# Altium PCB mcu2.PcbDoc
Units mil, origin at the board's own origin, x right, y up, seen from the top; angles counter-clockwise.
Board outline 5622.9 x 6902.9 mil, 2 copper layers (Top Layer, Bottom Layer); 9 components, 25 nets, 74 pads, 1 vias.
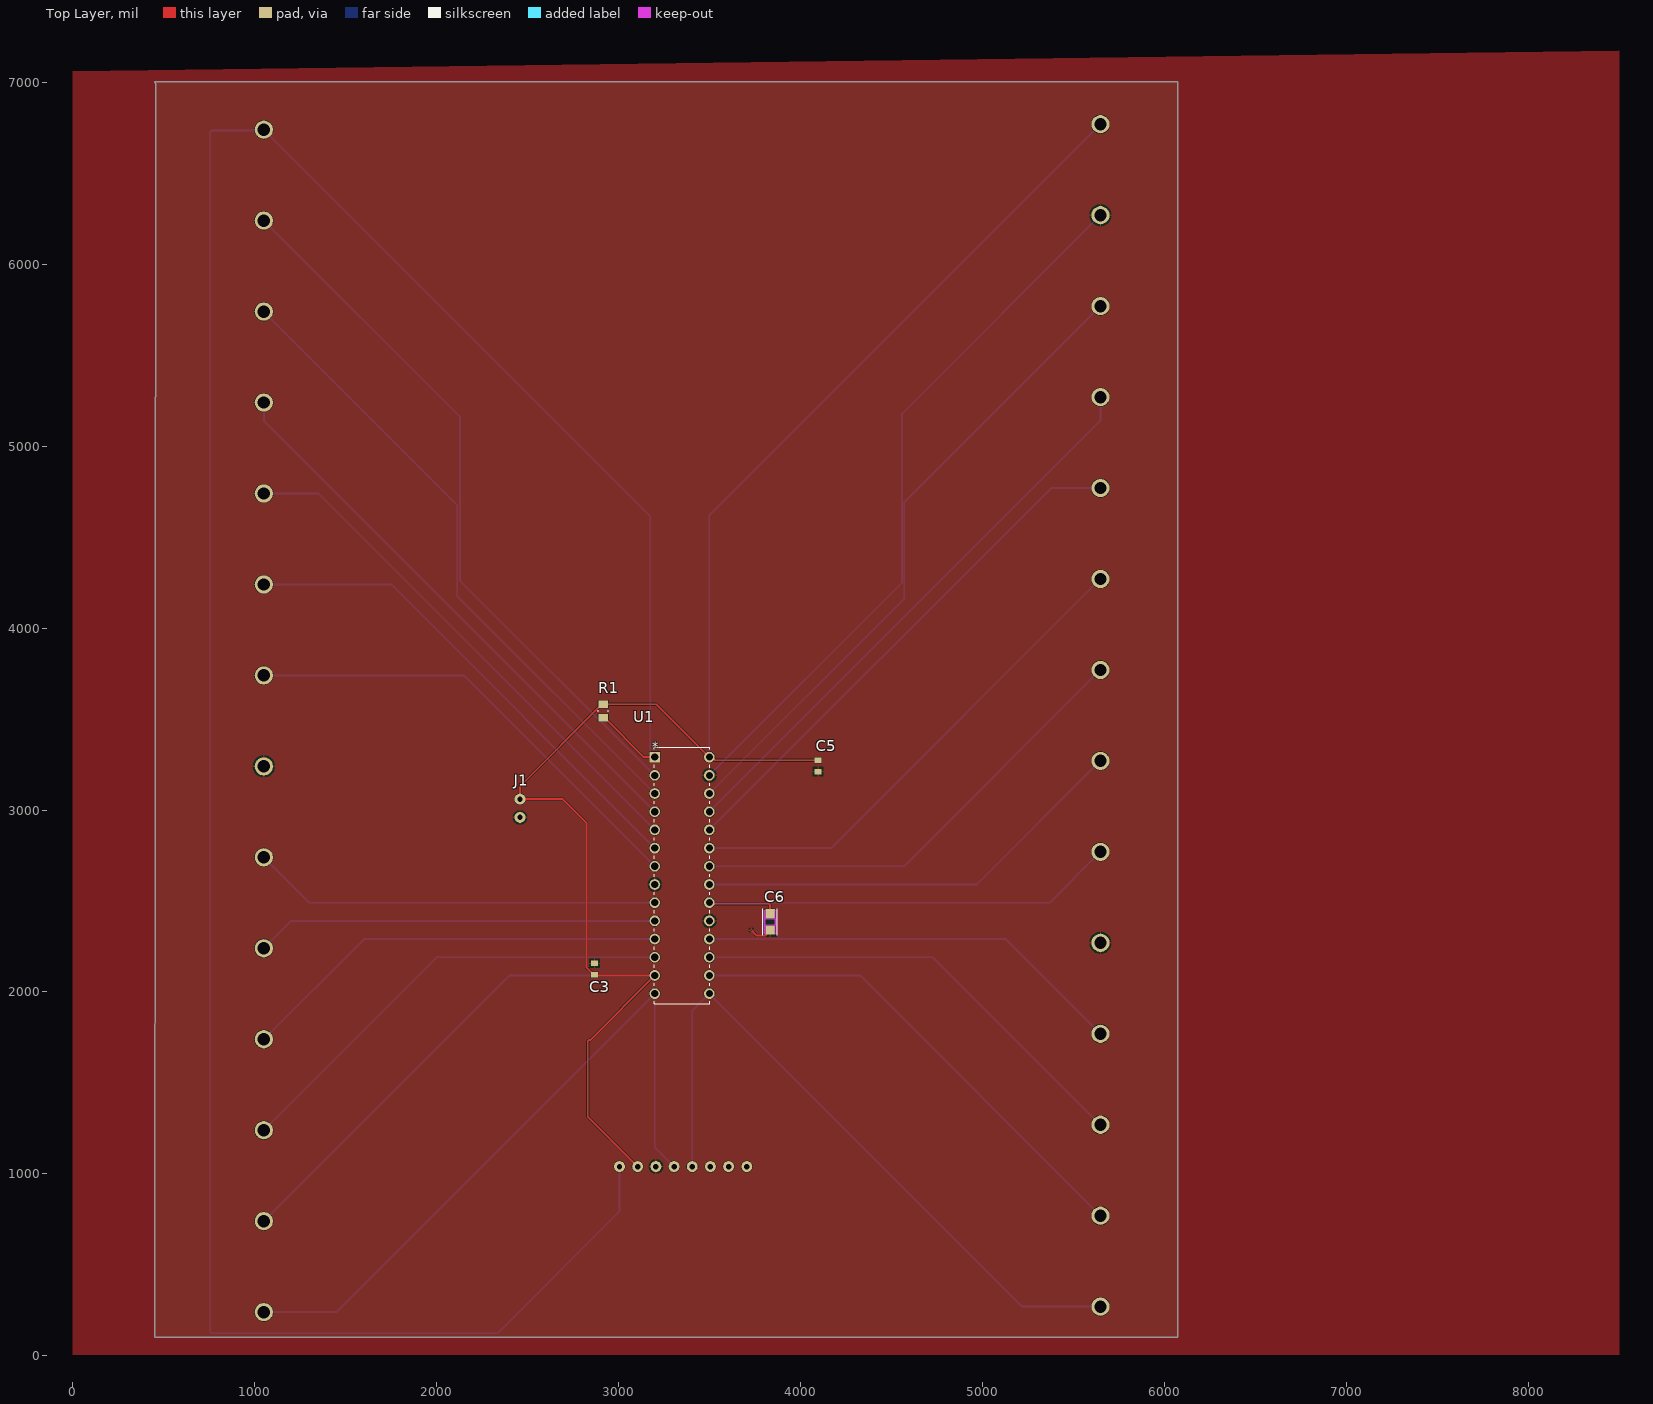
[diagram p0: Top Layer view]
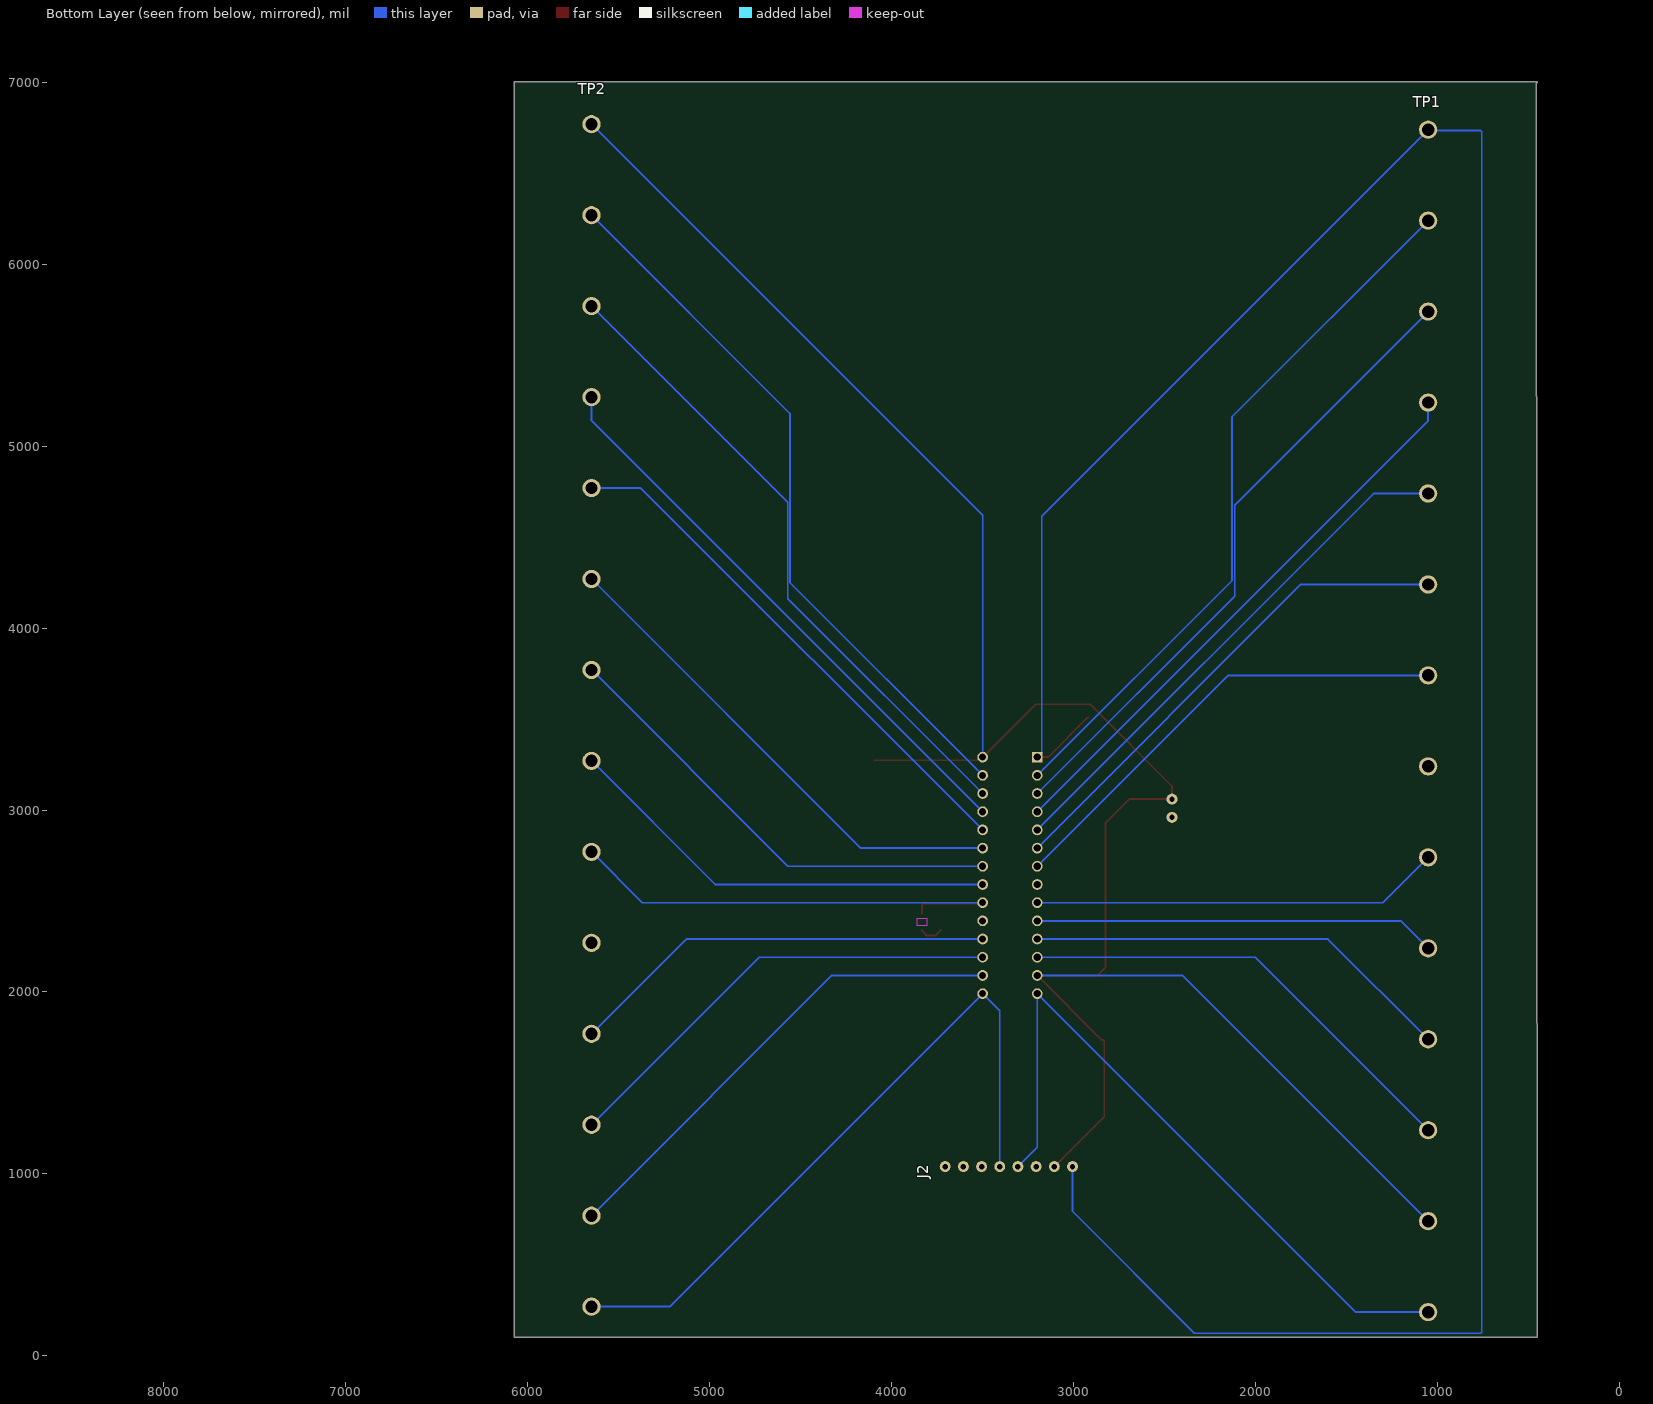
[diagram p1: Bottom Layer view, seen from below]
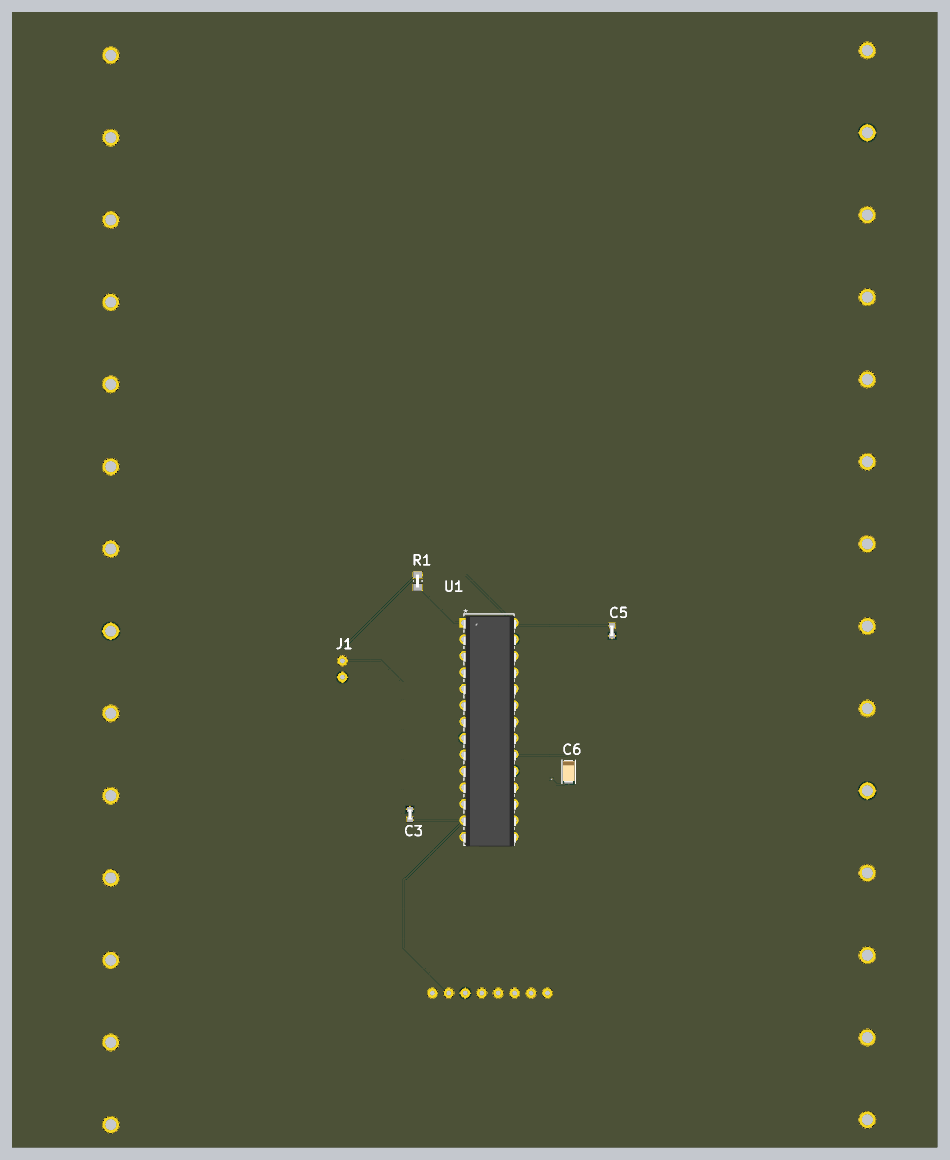
[diagram p2: 3D render of the assembled board from above, using the file's embedded part models]

## Layer stack, top to bottom
Top Solder: solder mask 0.4, Solder Resist, Dk 3.5
Top Layer: signal copper 1.4
Dielectric 1: dielectric 12.6, FR-4, Dk 4.8
Bottom Layer: signal copper 1.4
Bottom Solder: solder mask 0.4, Solder Resist, Dk 3.5

## Board outline
451.05,105 ccw(c455,105) 455,101.05 6070,101.05 ccw(c6070,105) 6073.95,105 6073.95,7000 ccw(c6070,7000) 6070,7003.95 455,7003.95 ccw(c455,7000) 455,6996.05 456.04,6996.05

## Design rules (kind name [scope] priority, off if disabled: settings)
Clearance [All] p1: gap=2 ignorepadtopadclearanceinfootprint=FALSE
PolygonConnect [All] p1: connectstyle=Relief reliefconductorwidth=10 reliefentries=4 polygonreliefangle="90 Angle" airgapwidth=10
RoomDefinition "MCU2S copy" [InComponentClass('MCU2S copy')] p1: confinementstyle=ConfineIn formatcopy=TRUE lockcomponents=FALSE outline 75,7085 7965,7085 7965,0 75,0
RoutingVias [All] p1: holewidth=10 width=10 viastyle="Through Hole" minholewidth=10 minwidth=10 maxholewidth=10 maxwidth=10
SilkToSolderMaskClearance [IsPad] p1: minsilkscreentomaskgap=0.1 clearancetoexposedcopper=TRUE
SolderMaskExpansion [All] p1: expansion=4 istentingtop=FALSE
SupplyNets "Schematic Supply Nets_1" [InNet('3.3V')] p1: voltage=0.000
SupplyNets "Schematic Supply Nets" [InNet('GND')] p2: voltage=0.000
Width [All] p1: maxlimit=20 minlimit=10 preferedwidth=10
29 further rules are at their usual default settings.

## Components (designator, comment, footprint, x,y, rotation, side; value= is the part's Value field where it differs from the comment)
C3 "C1206C104KARACTU" 0603 2868.12,2125.79 r270 top value=0.1uF
C5 "C1206C104KARACTU" 0603 4096.98,3242.64 r90 top value=0.1uF
C6 "TAJA106M010RNJ" TAJA106M010RNJ 3833.12,2384.79 r270 top value=10uF
J1 "CONN-2" CONN-2 2458.12,3059.79 r270 top
J2 "CONN-8" CONN-8 3005,1040 r0 bottom
R1 "RES 10K OHM 1% 1/8W 0805" 0805 2915.87,3544.32 r270 top value=10k
TP1 "" CONN-14 1050,6740 r270 bottom
TP2 "CONN-14" CONN-14 5649,270 r90 bottom
U1 "DSPIC33EP128GP502-E/SP" DSPIC33EP128GP502 3348.94,2640.78 r0 top

## Footprints (in the part's own frame and the unit in brackets; to place one, negate y for a bottom-side part, rotate by r counter-clockwise, add the part's x,y. Pads: shape width x height; smd on the part's side, far side on the other; paste and mask are expansions set on the pad)
0603 [mil]
  rect 30x38 smd: 1(-31,0) 2(31,0)
  body extent -31,-10 31,12, height 16
0805 [mm]
  rect 1.01x1.38 smd: 1(-0.95,0) 2(0.95,0)
  silkscreen extent -0.12,-0.68 0.12,0.68, body extent -1.03,-0.27 0.97,0.23, height 1.24
CONN-2 [mil]
  round 60 hole 30: 1(0,0) 2(100,0)
CONN-8 [mil]
  round 60 hole 30: 1(0,0) 2(100,0) 3(200,0) 4(300,0) 5(400,0) 6(500,0) 7(600,0) 8(700,0)
CONN-14 [mil]
  round 100 / inner round 60 / far side round 100 hole 68: 1(0,0) 2(500,0) 3(1000,0) 4(1500,0) 5(2000,0) 6(2500,0) 7(3000,0) 8(3500,0) 9(4000,0) 10(4500,0) 11(5000,0) 12(5500,0) 13(6000,0) 14(6500,0)
DSPIC33EP128GP502 [mil]
  rect 59x59 / inner round 60 / far side rect 59x59 hole 39 paste-99999 mask+0: 1(-150,650)
  round 59 / inner round 60 / far side round 59 hole 39 paste-99999 mask+0: 2(-150,550) 3(-150,450) 4(-150,350) 5(-150,250) 6(-150,150) 7(-150,50) 8(-150,-50) 9(-150,-150) 10(-150,-250) 11(-150,-350) 12(-150,-450) 13(-150,-550) 14(-150,-650) 15(150,-650) 16(150,-550) 17(150,-450) 18(150,-350) 19(150,-250) 20(150,-150) 21(150,-50) 22(150,50) 23(150,150) 24(150,250) 25(150,350) 26(150,450) 27(150,550) 28(150,650)
  silkscreen extent -152,-705 152,705, body extent -155,-710 164,690, height 205
TAJA106M010RNJ [mil]
  rect 49.98x53 smd paste+0 mask+0: 1(-45.01,0) 2(45.01,0)
  Top Layer keep-out region: -65,-33.5 -65,-29.5 65,-29.5 65,-33.5
  Top Layer keep-out region: -65,29.5 -65,33.5 65,33.5 65,29.5
  Top Layer keep-out region: -18.02,-29.5 -18.02,29.5 18.02,29.5 18.02,-29.5
  Keep-Out Layer region: -18.02,-29.5 -18.02,29.5 18.02,29.5 18.02,-29.5
  silkscreen extent -72,-41 72,41, body extent -72,-36 62,36, height 73

## Part data
C3 C5: "CAP CER 0.1UF 250V X7R 1206"
C6: "CAP TANT 10UF 20% 10V 1206"
J2: "J?"
R1: library part RMCF0805FT10K0, "10 kOhms ±1% 0.125W, 1/8W Chip Resistor 0805 (2012 Metric) Automotive AEC-Q200 Thick Film"
TP1: library part CONN-14
U1: "IC MCU 16BIT 128KB FLASH 28SPDIP"

## Via types
v1: diameter 10/10 (per signal layer), hole 10, Top Layer to Bottom Layer, tented both sides, 1 vias

## Nets (pads, with @x,y where several pads share a name; then routed paths per layer and width w, separated by ;. In a path a pad name is that pad's centre, name@x,y a point inside that pad or via, vN(x,y) a via of type N, cw(c..) or ccw(c..) an arc to the next point about the centre after c; other vN are vias at no path point)
3.3V: C3.2 C5.2 J1.1 J2.2 R1.1 TP1.13 TP2.14 U1.13 U1.28 | length 12026.5
  Top Layer w10: C3.2 2864.12,2094.79 2823.12,2135.79 2823.12,2929.79 2693.12,3059.79 J1.1 2458.12,3131.25 2908.59,3581.72 R1.1 3208,3581.72 U1.28 3512.2,3290.78 3529.34,3273.64 C5.2 ; C3.2@2868.13,2090.78 U1.13 2843.17,1735 2835.86,1735 2830.69,1729.83 2830.69,1314.31 J2.2
  Bottom Layer w10: TP1.13 2400.78,2090.78 U1.13@3195.78,2090.78 ; U1.28 3498.94,4619.94 TP2.14
GND: C3.1 C5.1 C6.2 J1.2 J2.3 TP1.8 TP2.5 TP2.13 U1.8 U1.19 U1.27 | length 4101
  Top Layer w10: v1(3729.37,2339.63) 3759.22,2309.79 3807.76,2309.79 3813.62,2315.65 3813.62,2320.28 C6.2
  Bottom Layer w10: U1.27 4558.05,4249.88 4558.05,5179.05 TP2.13
NetC6_1: C6.1 TP2.6 U1.20 | length 2653.3
  Top Layer w10: U1.20 3504.93,2484.79 3826.28,2484.79 3832.13,2478.93 3832.13,2430.78 C6.1
  Bottom Layer w10: U1.20 5369.78,2490.78 TP2.6
NetJ2_1: J2.1 R1.2 TP1.1 U1.1 | length 14386.6
  Top Layer w10: R1.2 2923.16,3506.92 3139.3,3290.78 U1.1
  Bottom Layer w10: J2.1 3005,794.14 2335,124.14 760.86,124.14 755,130 755,6729.14 760.86,6735 1045,6735 TP1.1 3174.44,4615.56 3174.44,3315.28 3194.72,3295 3195,3295 3198.94,3291.06 U1.1
NetJ2_4: J2.4 TP1.14 U1.14 | length 3868.8
  Bottom Layer w10: TP1.14 1448.17,240 U1.14 3198.94,1146.06 J2.4
NetJ2_5: J2.5 TP2.1 U1.15 | length 3852.5
  Bottom Layer w10: J2.5 3405,1896.83 U1.15 5219.72,270 TP2.1
NetTP1_2: TP1.2 U1.2 | length 3939.3
  Bottom Layer w10: TP1.2 2128.39,5161.61 2128.39,4261.33 U1.2
NetTP1_3: TP1.3 U1.3 | length 3539.3
  Bottom Layer w10: TP1.3 2113.39,4676.61 2113.39,4176.33 U1.3
NetTP1_4: TP1.4 U1.4 | length 3139.3
  Bottom Layer w10: TP1.4 1050,5139.72 U1.4
NetTP1_5: TP1.5 U1.5 | length 2914.9
  Bottom Layer w10: TP1.5 1349.72,4740 U1.5
NetTP1_6: TP1.6 U1.6 | length 2749.2
  Bottom Layer w10: TP1.6 1749.72,4240 U1.6
NetTP1_7: TP1.7 U1.7 | length 2583.5
  Bottom Layer w10: TP1.7 2149.72,3740 U1.7
NetTP1_9: TP1.9 U1.9 | length 2252.2
  Bottom Layer w10: TP1.9 1299.22,2490.78 U1.9
NetTP1_10: TP1.10 U1.10 | length 2211.4
  Bottom Layer w10: TP1.10 1200.78,2390.78 U1.10
NetTP1_11: TP1.11 U1.11 | length 2377.1
  Bottom Layer w10: TP1.11 1600.78,2290.78 U1.11
NetTP1_12: TP1.12 U1.12 | length 2542.8
  Bottom Layer w10: TP1.12 2000.78,2190.78 U1.12
NetTP2_2: TP2.2 U1.16 | length 2697.1
  Bottom Layer w10: U1.16 4328.22,2090.78 TP2.2
NetTP2_3: TP2.3 U1.17 | length 2531.5
  Bottom Layer w10: U1.17 4728.22,2190.78 TP2.3
NetTP2_4: TP2.4 U1.18 | length 2365.8
  Bottom Layer w10: U1.18 5128.22,2290.78 TP2.4
NetTP2_7: TP2.7 U1.21 | length 2431.4
  Bottom Layer w10: U1.21 4969.78,2590.78 TP2.7
NetTP2_8: TP2.8 U1.22 | length 2597.1
  Bottom Layer w10: U1.22 4569.78,2690.78 TP2.8
NetTP2_9: TP2.9 U1.23 | length 2780.6
  Bottom Layer w10: U1.23@3508.17,2800 3500,2800 3498.94,2798.94 U1.23 4169.78,2790.78 TP2.9
NetTP2_10: TP2.10 U1.24 | length 2932.5
  Bottom Layer w10: U1.24@3498.94,2894.86 U1.24 5378.17,4770 TP2.10
NetTP2_11: TP2.11 U1.25 | length 3169.8
  Bottom Layer w10: U1.25 5649,5140.83 TP2.11
NetTP2_12: TP2.12 U1.26 | length 3569.8
  Bottom Layer w10: U1.26 4570.05,4161.88 4570.05,4691.05 TP2.12
pads on no net: J2.6 J2.7 J2.8

## Polygon pours and split planes (outlines as drawn)
GND on Top Layer "GND_L01_P001" (solid, pour order 1): 0,4.61 0,7061.09 8500.39,7173.46 8500.39,4.61

## Silkscreen, mask and mechanical layers (free items; w line width, h text height)
board outline:
  lines w7.87: 455,7000 6070,7000 6070,105 455,105 460,7000

## Text inside footprints (layer, text, board x,y; h text height)
U1: Top Overlay "*" at 3186.44,3325.28 h50; Mechanical 13 "*" at 3198.94,3265.78 h50